# EAGLE board qPCR_pcb_breakout_ADS1219IPWR (EAGLE 9.6.1)
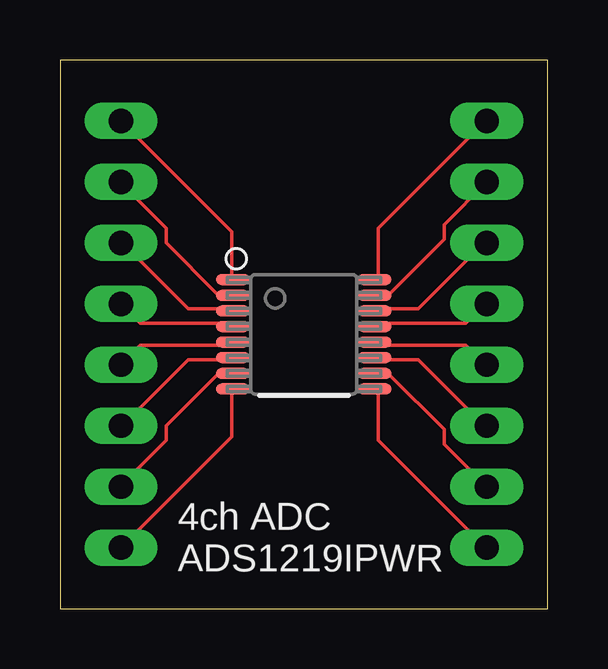
[diagram p0: board, top side]
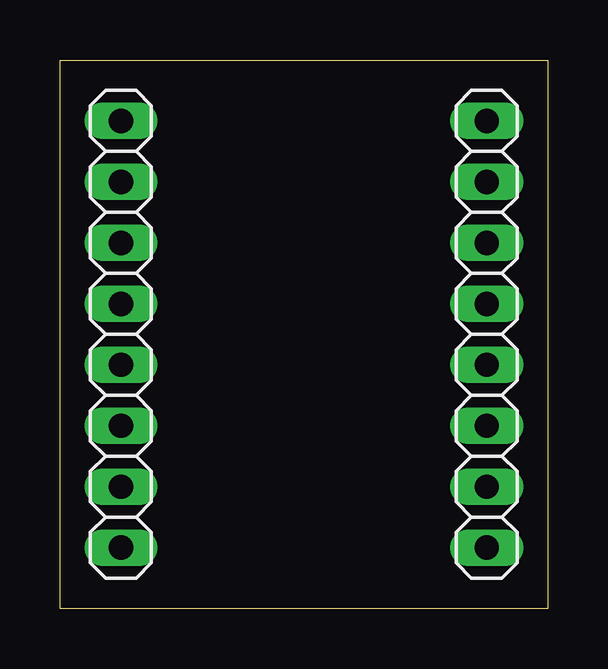
[diagram p1: board, bottom side, seen from below]

Size 20.32 x 22.86 mm. Coordinates in mm from the lower left corner, seen from the top.
Outline: 0,0 20.32,0 20.32,22.86 0,22.86 0,0
Copper layers (1*16): Top 0.035mm / dielectric 1.5mm / Bottom 0.035mm
Design rules "default": minimum track width 6mil, minimum drill 0.35mm, track to track 6mil, track to pad 6mil, pad to pad 6mil, via to via 6mil, smd to smd 6mil, copper to edge 40mil, drill to drill 6mil, minimum pad ring 10mil, minimum via ring 8mil, stop-mask expansion 4mil, vias tented up to drill 0mil, thermal gap 10mil

## Footprints (pad centres in the part's own frame; a part is rotated, then mirrored left to right if it is on the bottom)
1X08 = drill 1.016 long: 1 -8.89,0; 2 -6.35,0; 3 -3.81,0; 4 -1.27,0; 5 1.27,0; 6 3.81,0; 7 6.35,0; 8 8.89,0
PW0016A_N = smd 1.4 x 0.45: 1 -2.95,2.275; 2 -2.95,1.625; 3 -2.95,0.975; 4 -2.95,0.325; 5 -2.95,-0.325; 6 -2.95,-0.975; 7 -2.95,-1.625; 8 -2.95,-2.275; 9 2.95,-2.275; 10 2.95,-1.625; 11 2.95,-0.975; 12 2.95,-0.325; 13 2.95,0.325; 14 2.95,0.975; 15 2.95,1.625; 16 2.95,2.275

## Placement (x,y rotation side)
JP1  [1X08]  2.54,11.43 270 bottom
JP2  [1X08]  17.78,11.43 270 bottom
U1  Value  [PW0016A_N]  10.16,11.43 0 top

## Library data of the parts
JP1 JP2 = pinhead
U1 = Ninja_qPCR; MANUFACTURER: Texas Instruments; PARTNUMBER: ADS1219IPWR; REFDES: RefDes; TYPE: TYPE

## Nets
1: JP1.1 U1.1
2: JP1.2 U1.2
3: JP1.3 U1.3
4: JP1.4 U1.4
5: JP1.5 U1.5
6: JP1.6 U1.6
7: JP1.7 U1.7
8: JP1.8 U1.8
9: JP2.8 U1.9
10: JP2.7 U1.10
11: JP2.6 U1.11
12: JP2.5 U1.12
13: JP2.4 U1.13
14: JP2.3 U1.14
15: JP2.2 U1.15
16: JP2.1 U1.16

## Tracks (layer width: path | path; a pad name or v marks a point on that pad's centre or on a via)
1
  Top 0.152: JP1.1 7.16,15.7 7.16,13.72 U1.1
2
  Top 0.152: U1.2 7.16,13.11 6.55,13.11 4.42,15.24 4.42,15.85 2.59,17.68 JP1.2
3
  Top 0.152: U1.3 7.16,12.5 5.33,12.5 2.59,15.24 JP1.3
4
  Top 0.152: JP1.4 3.35,11.89 7.16,11.89 U1.4
5
  Top 0.152: JP1.5 3.35,10.97 7.16,10.97 U1.5
6
  Top 0.152: U1.6 7.16,10.36 5.33,10.36 2.59,7.62 JP1.6
7
  Top 0.152: U1.7 7.16,9.75 6.55,9.75 4.42,7.62 4.42,7.01 2.59,5.18 JP1.7
8
  Top 0.152: JP1.8 7.16,7.16 7.16,9.14 U1.8
9
  Top 0.152: U1.9 13.26,9.14 13.26,7.01 17.68,2.59 JP2.8
10
  Top 0.152: JP2.7 16,6.86 16,7.47 13.72,9.75 13.26,9.75 U1.10
11
  Top 0.152: U1.11 13.26,10.36 14.94,10.36 17.68,7.62 JP2.6
12
  Top 0.152: U1.12 13.26,10.97 16.92,10.97 17.68,10.21 JP2.5
13
  Top 0.152: U1.13 13.26,11.89 16.92,11.89 17.68,12.65 JP2.4
14
  Top 0.152: U1.14 13.26,12.5 14.94,12.5 17.68,15.24 JP2.3
15
  Top 0.152: JP2.2 16,16 16,15.39 13.72,13.11 13.26,13.11 U1.15
16
  Top 0.152: U1.16 13.26,13.72 13.26,15.85 17.68,20.27 JP2.1

## Text on the board
tPlace: 4ch ADC / ADS1219IPWR